# EAGLE board Analog CAN Module (EAGLE 7.7.0), part 1 of 2
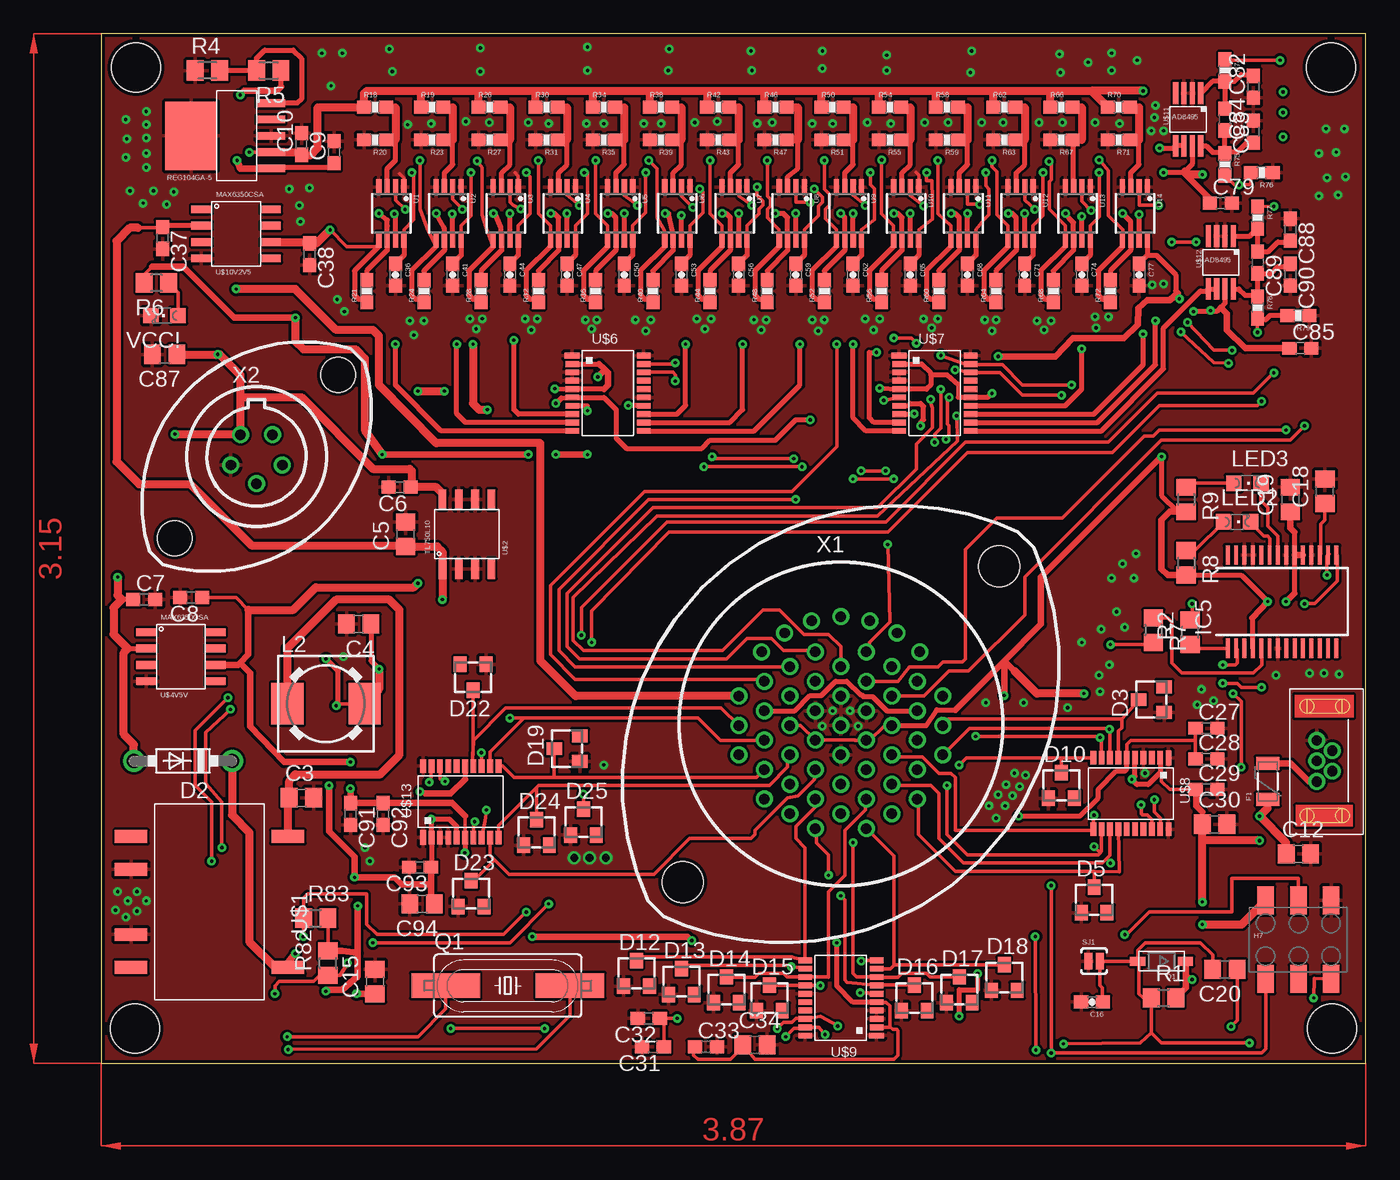
[diagram p0: board, top side]
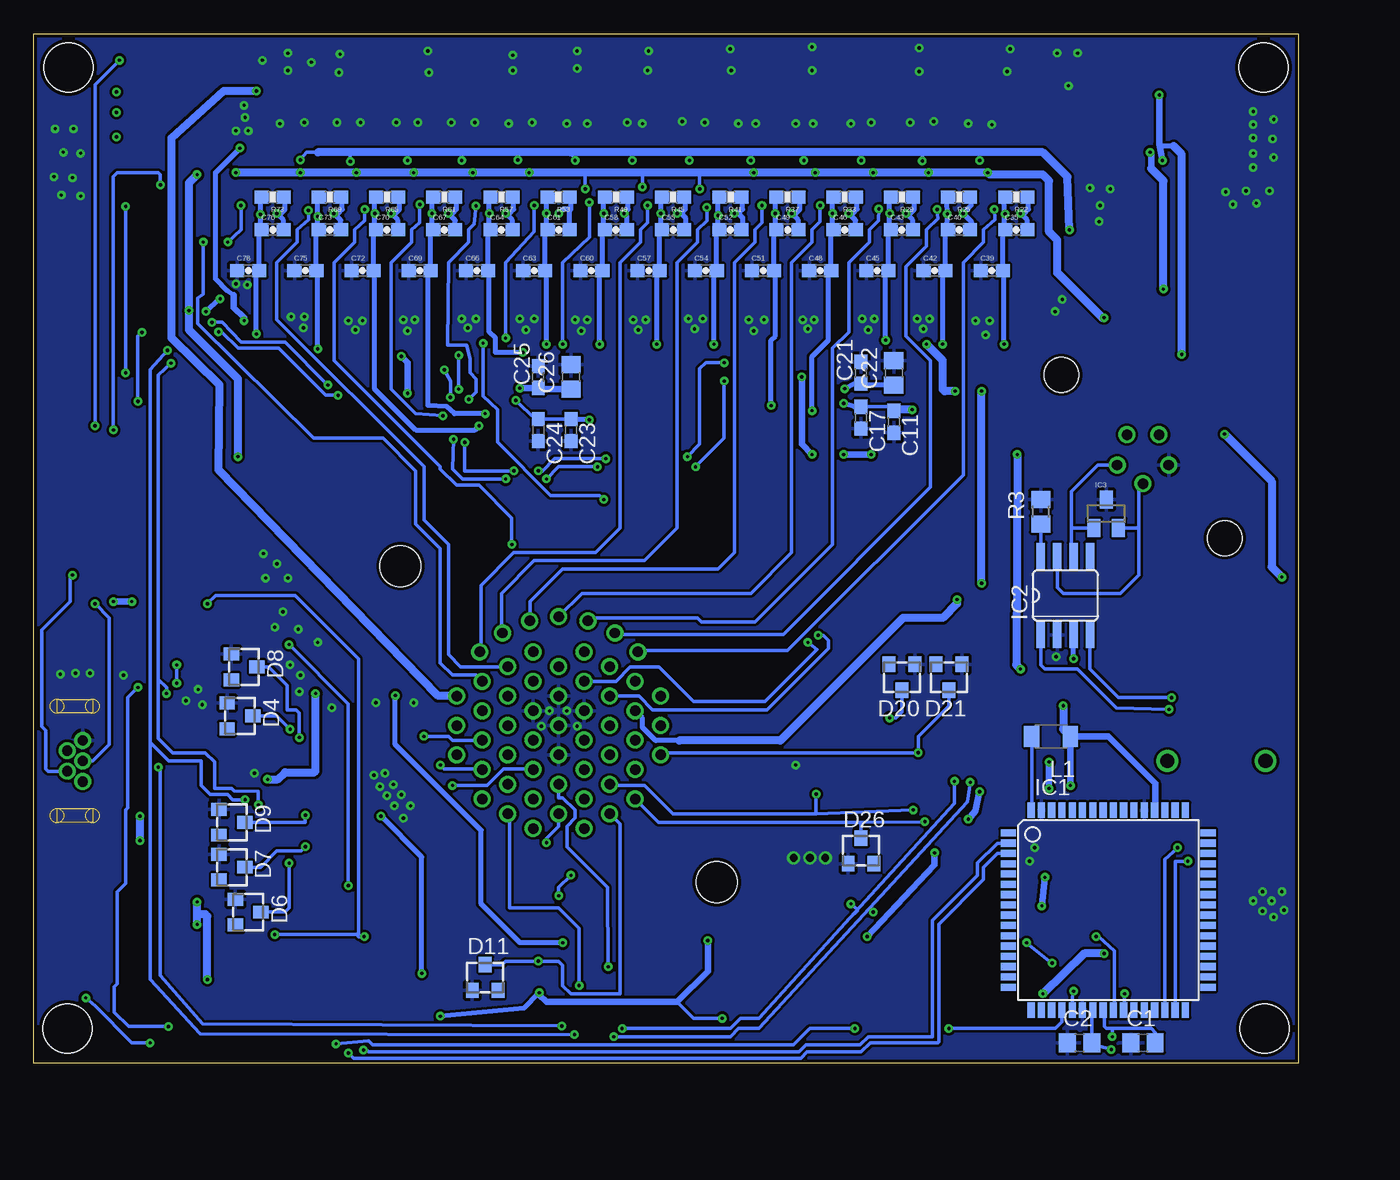
[diagram p1: board, bottom side, seen from below]

Size 98.25 x 80 mm. Coordinates in mm from the lower left corner, seen from the top.
Outline: 0,0 98.25,0 98.25,80 0,80 0,0
Copper layers (1*16): Top 0.035mm / dielectric 1.5mm / Bottom 0.035mm
Design rules "default *": minimum track width 8mil, minimum drill 10mil, track to track 8mil, track to pad 8mil, pad to pad 8mil, via to via 8mil, smd to smd 8mil, copper to edge 11mil, drill to drill 11mil, minimum pad ring 10mil, minimum via ring 8mil, stop-mask expansion 4mil, vias tented up to drill 0mil, thermal gap 10mil
Holes 3.81 mm at 95.57,77.39 2.7,77.39 2.62,2.7 95.65,2.7

## Footprints (pad centres in the part's own frame; a part is rotated, then mirrored left to right if it is on the bottom)
C0805 = smd 1.3 x 1.5: 1 -0.95,0; 2 0.95,0
C0603 = smd 1.1 x 1: 1 -0.85,0; 2 0.85,0
0603-CAP = smd 1.1 x 1: 1 -0.85,0; 2 0.85,0
SOD-123 = smd 1.2 x 0.7: A 1.85,0; C -1.85,0
DO41-7.6 = drill 1.1 pad 1.7: A 3.81,0; C -3.81,0
TO236 = smd 1 x 1.2: A -1,-1; C 0,1; NC 1,-1
PTC-1206 = smd 1 x 1.8: 1 -1.4,0; 2 1.4,0
2X3_SMD_FCI_54202-G30 = smd 1.27 x 2.18: 1 -2.54,-3.05; 2 -2.54,3.05; 3 0,-3.05; 4 0,3.05; 5 2.54,-3.05; 6 2.54,3.05
TQFP64 = smd 1.194 x 0.559: 1 -7.76,6; 2 -7.76,5.2; 3 -7.76,4.4; 4 -7.76,3.6; 5 -7.76,2.8; 6 -7.76,2; 7 -7.76,1.2; 8 -7.76,0.4; 9 -7.76,-0.4; 10 -7.76,-1.2; 11 -7.76,-2; 12 -7.76,-2.8; 13 -7.76,-3.6; 14 -7.76,-4.4; 15 -7.76,-5.2; 16 -7.76,-6; 33 7.76,-6; 34 7.76,-5.2; 35 7.76,-4.4; 36 7.76,-3.6; 37 7.76,-2.8; 38 7.76,-2; 39 7.76,-1.2; 40 7.76,-0.4; 41 7.76,0.4; 42 7.76,1.2; 43 7.76,2; 44 7.76,2.8; 45 7.76,3.6; 46 7.76,4.4; 47 7.76,5.2; 48 7.76,6 | smd 0.559 x 1.194: 17 -6,-7.76; 18 -5.2,-7.76; 19 -4.4,-7.76; 20 -3.6,-7.76; 21 -2.8,-7.76; 22 -2,-7.76; 23 -1.2,-7.76; 24 -0.4,-7.76; 25 0.4,-7.76; 26 1.2,-7.76; 27 2,-7.76; 28 2.8,-7.76; 29 3.6,-7.76; 30 4.4,-7.76; 31 5.2,-7.76; 32 6,-7.76; 49 6,7.76; 50 5.2,7.76; 51 4.4,7.76; 52 3.6,7.76; 53 2.8,7.76; 54 2,7.76; 55 1.2,7.76; 56 0.4,7.76; 57 -0.4,7.76; 58 -1.2,7.76; 59 -2,7.76; 60 -2.8,7.76; 61 -3.6,7.76; 62 -4.4,7.76; 63 -5.2,7.76; 64 -6,7.76
SO08 = smd 0.66 x 2.032: 1 -1.905,-3.073; 2 -0.635,-3.073; 3 0.635,-3.073; 4 1.905,-3.073; 5 1.905,3.073; 6 0.635,3.073; 7 -0.635,3.073; 8 -1.905,3.073
SOT-23 = smd 1 x 1.4: 1 -0.95,-1.1; 2 0.95,-1.1; 3 0,1.1
SSOP28 = smd 0.381 x 1.499: 1 -4.225,-3.625; 2 -3.575,-3.625; 3 -2.925,-3.625; 4 -2.275,-3.625; 5 -1.625,-3.625; 6 -0.975,-3.625; 7 -0.325,-3.625; 8 0.325,-3.625; 9 0.975,-3.625; 10 1.625,-3.625; 11 2.275,-3.625; 12 2.925,-3.625; 13 3.575,-3.625; 14 4.225,-3.625; 15 4.225,3.625; 16 3.575,3.625; 17 2.925,3.625; 18 2.275,3.625; 19 1.625,3.625; 20 0.975,3.625; 21 0.325,3.625; 22 -0.325,3.625; 23 -0.975,3.625; 24 -1.625,3.625; 25 -2.275,3.625; 26 -2.925,3.625; 27 -3.575,3.625; 28 -4.225,3.625
L3216C = smd 1.2 x 1.6: 1 -1.5,0; 2 1.5,0
DR73 = smd 2.5 x 3.25: 1 -3,0; 2 3,0
CHIPLED_0805 = smd 1.2 x 1.2: A 0,-1.05; C 0,1.05
HC49UP = smd 5.334 x 1.93: 1 -4.826,0; 2 4.826,0
R0805 = smd 1.3 x 1.5: 1 -0.95,0; 2 0.95,0
M0805 = smd 1.3 x 1.6: 1 -0.95,0; 2 0.95,0
0603-RES = smd 1.1 x 1: 1 -0.85,0; 2 0.85,0
SJ_2S-NO = smd 0.635 x 1.27: 1 -0.45,0; 2 0.45,0
MSOP8 = smd 0.4 x 1.2: 1 -0.975,-2.05; 2 -0.325,-2.05; 3 0.325,-2.05; 4 0.975,-2.05; 5 0.975,2.05; 6 0.325,2.05; 7 -0.325,2.05; 8 -0.975,2.05
V78XX-1000 = smd 1 x 2.54: 1 -5.08,-6.096; 5 5.08,-6.096; 6 5.08,6.096; 7 2.54,6.096; 9 -2.54,6.096; 10 -5.08,6.096
8-SOIC = smd 0.6 x 1.55: P1 -1.905,-2.7; P2 -0.635,-2.7; P3 0.635,-2.7; P4 1.905,-2.7; P5 1.905,2.7; P6 0.635,2.7; P7 -0.635,2.7; P8 -1.905,2.7
REG104GA-5 = smd 0.6 x 2.2: ENABLE 2.54,-6.2; GND 0,-6.2; NR/ADJUST 1.27,-6.2; VIN -2.54,-6.2; VOUT -1.27,-6.2 | smd 5.3 x 4: HEATGND 0,0
20TSSOP = smd 0.45 x 1.15: 1 -2.925,-2.775 | smd 0.45 x 1.05: 2 -2.275,-2.775; 3 -1.625,-2.775; 4 -0.975,-2.775; 5 -0.325,-2.775; 6 0.325,-2.775; 7 0.975,-2.775; 8 1.625,-2.775; 9 2.275,-2.775; 10 2.925,-2.775; 11 2.925,2.775; 12 2.275,2.775; 13 1.625,2.775; 14 0.975,2.775; 15 0.325,2.775; 16 -0.325,2.775; 17 -0.975,2.775; 18 -1.625,2.775; 19 -2.275,2.775; 20 -2.925,2.775
8MSOP = smd 0.4 x 1.7: P1 -0.975,-2.05; P2 -0.325,-2.05; P3 0.325,-2.05; P4 0.975,-2.05; P5 0.975,2.05; P6 0.325,2.05; P7 -0.325,2.05; P8 -0.975,2.05
MUSBB = drill 0.8: P1 -1.6,0; P2 -0.8,-1.2; P3 0,0; P4 0.8,-1.2; P5 1.6,0
AS16-35 = drill 0.813: 1 -7.925,2.184; 2 -7.925,-0.102; 3 -7.925,-2.388; 4 -6.147,5.613; 5 -5.944,3.327; 6 -5.944,1.041; 7 -5.944,-1.245; 8 -5.944,-3.531; 9 -5.944,-5.817; 10 -4.369,7.087; 11 -3.962,4.47; 12 -3.962,2.184; 13 -3.962,-0.102; 14 -3.962,-2.388; 15 -3.962,-4.674; 16 -3.962,-6.96; 17 -2.261,8.026; 18 -1.981,5.613; 19 -1.981,3.327; 20 -1.981,1.041; 21 -1.981,-1.245; 22 -1.981,-3.531; 23 -1.981,-5.817; 24 -1.981,-8.103; 25 0,8.357; 26 0,4.47; 27 0,2.184; 28 0,-0.102; 29 0,-2.388; 30 0,-4.674; 31 0,-6.96; 32 2.261,8.026; 33 1.981,5.613; 34 1.981,3.327; 35 1.981,1.041; 36 1.981,-1.245; 37 1.981,-3.531; 38 1.981,-5.817; 39 1.981,-8.103; 40 4.369,7.087; 41 3.962,4.47; 42 3.962,2.184; 43 3.962,-0.102; 44 3.962,-2.388; 45 3.962,-4.674; 46 3.962,-6.96; 47 6.147,5.613; 48 5.944,3.327; 49 5.944,1.041; 50 5.944,-1.245; 51 5.944,-3.531; 52 5.944,-5.817; 53 7.925,2.184; 54 7.925,-0.102; 55 7.925,-2.388 | hole 3.2: 12.29,12.29; -12.29,-12.29
AS06-05 = drill 0.813: 1 -1.245,1.702; 2 -2.007,-0.66; 3 0,-2.108; 4 2.007,-0.66; 5 1.245,1.702 | hole 2.7: -6.35,-6.35; 6.35,6.35

## Placement (x,y rotation side)
C1  18pF  [C0805]  12.06,1.59 0 bottom
C2  18pF  [C0805]  16.99,1.59 0 bottom
C3  22uF  [C0805]  15.56,20.64 0 top
C4  22uF  [C0805]  20,34.13 180 top
C5  10uF  [C0805]  23.65,41.12 90 top
C6  0.1uF  [C0603]  23.18,44.77 180 top
C7  2.2uF  [C0603]  3.33,36.04 0 top
C8  2.2uF  [C0603]  6.99,36.2 180 top
C9  0.1uF  [C0603]  18.1,70.8 90 top
C10  0.1uF  [C0603]  15.56,71.44 90 top
C11  1uF  [C0603]  31.43,49.85 270 bottom
C12  100n  [C0805]  93.03,16.27 0 top
C15  10uF  [C0805]  21.27,6.35 90 top
C16  4.7nF  [0603-CAP]  76.99,4.76 180 top
C17  0.1uF  [C0603]  33.97,50.16 270 bottom
C18  100n  [C0805]  95.09,44.45 90 top
C19  100n  [C0805]  92.39,43.81 90 top
C20  100n  [C0805]  87.31,7.3 180 top
C21  0.1uF  [C0603]  33.97,53.66 90 bottom
C22  10uF  [C0805]  31.43,53.66 90 bottom
C23  1uF  [C0603]  56.52,49.21 270 bottom
C24  0.1uF  [C0603]  59.05,49.21 270 bottom
C25  0.1uF  [C0603]  59.05,53.34 90 bottom
C26  10uF  [C0805]  56.52,53.34 90 bottom
C27  1uF  [C0603]  85.88,26.04 0 top
C28  0.1uF  [C0603]  85.88,23.65 0 top
C29  0.1uF  [C0603]  85.88,21.27 0 top
C30  10uF  [C0805]  86.52,18.57 0 top
C31  1uF  [C0603]  42.86,1.27 180 top
C32  0.1uF  [C0603]  42.55,3.49 180 top
C33  0.1uF  [C0603]  46.99,1.27 0 top
C34  10uF  [C0805]  50.8,1.43 0 top
C35  .1uF  [0603-CAP]  21.91,64.77 0 bottom
C36  .1uF  [0603-CAP]  22.86,61.28 270 top
C37  2.2uF  [C0603]  4.76,64.14 270 top
C38  2.2uF  [C0603]  16.19,62.87 270 top
C39  .1uF  [0603-CAP]  23.81,61.59 0 bottom
C40  .1uF  [0603-CAP]  26.35,64.77 0 bottom
C41  .1uF  [0603-CAP]  27.3,61.28 270 top
C42  .1uF  [0603-CAP]  28.26,61.59 0 bottom
C43  .1uF  [0603-CAP]  30.8,64.77 0 bottom
C44  .1uF  [0603-CAP]  31.75,61.28 270 top
C45  .1uF  [0603-CAP]  32.7,61.59 0 bottom
C46  .1uF  [0603-CAP]  35.24,64.77 0 bottom
C47  .1uF  [0603-CAP]  36.2,61.28 270 top
C48  .1uF  [0603-CAP]  37.15,61.59 0 bottom
C49  .1uF  [0603-CAP]  39.69,64.77 0 bottom
C50  .1uF  [0603-CAP]  40.64,61.28 270 top
C51  .1uF  [0603-CAP]  41.59,61.59 0 bottom
C52  .1uF  [0603-CAP]  44.13,64.77 0 bottom
C53  .1uF  [0603-CAP]  45.09,61.28 270 top
C54  .1uF  [0603-CAP]  46.04,61.59 0 bottom
C55  .1uF  [0603-CAP]  48.58,64.77 0 bottom
C56  .1uF  [0603-CAP]  49.53,61.28 270 top
C57  .1uF  [0603-CAP]  50.48,61.59 0 bottom
C58  .1uF  [0603-CAP]  53.02,64.77 0 bottom
C59  .1uF  [0603-CAP]  53.98,61.28 270 top
C60  .1uF  [0603-CAP]  54.93,61.59 0 bottom
C61  .1uF  [0603-CAP]  57.47,64.77 0 bottom
C62  .1uF  [0603-CAP]  58.42,61.28 270 top
C63  .1uF  [0603-CAP]  59.37,61.59 0 bottom
C64  .1uF  [0603-CAP]  61.91,64.77 0 bottom
C65  .1uF  [0603-CAP]  62.87,61.28 270 top
C66  .1uF  [0603-CAP]  63.82,61.59 0 bottom
C67  .1uF  [0603-CAP]  66.36,64.77 0 bottom
C68  .1uF  [0603-CAP]  67.31,61.28 270 top
C69  .1uF  [0603-CAP]  68.26,61.59 0 bottom
C70  .1uF  [0603-CAP]  70.8,64.77 0 bottom
C71  .1uF  [0603-CAP]  71.75,61.28 270 top
C72  .1uF  [0603-CAP]  72.71,61.59 0 bottom
C73  .1uF  [0603-CAP]  75.25,64.77 0 bottom
C74  .1uF  [0603-CAP]  76.2,61.28 270 top
C75  .1uF  [0603-CAP]  77.15,61.59 0 bottom
C76  .1uF  [0603-CAP]  79.69,64.77 0 bottom
C77  .1uF  [0603-CAP]  80.64,61.28 270 top
C78  .1uF  [0603-CAP]  81.6,61.59 0 bottom
C79  0.1uF  [C0603]  87,66.83 0 top
C82  1nF  [C0603]  89.53,75.88 90 top
C83  10nF  [C0603]  87.31,73.34 270 top
C84  1nF  [C0603]  89.53,72.39 90 top
C85  0.1uF  [C0603]  93.19,55.56 0 top
C87  47uF  [C0805]  4.92,55.09 180 top
C88  1nF  [C0603]  92.39,64.77 270 top
C89  10nF  [C0603]  89.85,62.23 270 top
C90  1nF  [C0603]  92.39,61.28 270 top
C91  1uF  [C0603]  19.37,19.37 270 top
C92  0.1uF  [C0603]  21.91,19.37 270 top
C93  0.1uF  [C0603]  24.77,15.24 180 top
C94  10uF  [C0805]  24.92,12.38 180 top
D1  1N4148  [SOD-123]  82.39,7.94 180 top
D2  1N5819  [DO41-7.6]  6.35,23.5 180 top
D3  BZX84CSMD  [TO236]  81.6,28.26 90 top
D4  BZX84CSMD  [TO236]  82.23,26.99 270 bottom
D5  BZX84CSMD  [TO236]  77.15,12.7 0 top
D6  BZX84CSMD  [TO236]  81.6,11.75 270 bottom
D7  BZX84CSMD  [TO236]  82.87,15.24 270 bottom
D8  BZX84CSMD  [TO236]  81.92,30.8 270 bottom
D9  BZX84CSMD  [TO236]  82.87,18.73 270 bottom
D10  BZX84CSMD  [TO236]  74.61,21.59 0 top
D11  BZX84CSMD  [TO236]  63.18,6.67 0 bottom
D12  BZX84CSMD  [TO236]  41.59,6.99 0 top
D13  BZX84CSMD  [TO236]  45.09,6.35 0 top
D14  BZX84CSMD  [TO236]  48.58,5.71 0 top
D15  BZX84CSMD  [TO236]  51.91,5.08 0 top
D16  BZX84CSMD  [TO236]  63.18,5.08 0 top
D17  BZX84CSMD  [TO236]  66.67,5.71 0 top
D18  BZX84CSMD  [TO236]  70.17,6.67 0 top
D19  BZX84CSMD  [TO236]  36.2,24.45 90 top
D20  BZX84CSMD  [TO236]  30.8,30 180 bottom
D21  BZX84CSMD  [TO236]  27.15,30 180 bottom
D22  BZX84CSMD  [TO236]  28.89,30 180 top
D23  BZX84CSMD  [TO236]  28.73,13.18 0 top
D24  BZX84CSMD  [TO236]  33.81,17.94 0 top
D25  BZX84CSMD  [TO236]  37.47,18.73 0 top
D26  BZX84CSMD  [TO236]  33.97,16.51 0 bottom
F1  16V,0.25A  [PTC-1206]  90.65,21.91 90 top
H7  ICSP  [2X3_SMD_FCI_54202-G30]  93.03,9.6 0 top
IC1  AT90CAN128  [TQFP64]  14.76,11.91 0 bottom
IC2  MCP2551SO8  [SO08]  18.1,36.35 0 bottom
IC3  NUP2105L  [SOT-23]  14.92,42.7 0 bottom
IC5  FT232RL  [SSOP28]  91.76,35.88 0 top
L1  CS321613-100K  [L3216C]  19.21,25.4 180 bottom
L2  22uH  [DR73]  17.46,27.94 0 top
LED2  RX  [CHIPLED_0805]  88.27,42.07 270 top
LED3  TX  [CHIPLED_0805]  89.06,45.09 270 top
Q1  56P2859  [HC49UP]  31.59,6.03 0 top
R1  100K  [R0805]  82.55,5.08 0 top
R2  1k  [R0805]  84.61,33.5 90 top
R3  100K  [R0805]  20,42.86 90 bottom
R4  100K  [M0805]  8.26,77.15 0 top
R5  100K  [M0805]  13.02,77.15 180 top
R6  1K  [R0805]  4.29,60.64 180 top
R7  1k  [R0805]  81.76,33.66 270 top
R8  1k  [R0805]  84.3,38.89 270 top
R9  1k  [R0805]  84.3,43.81 270 top
R18  1k  [0603-RES]  21.27,74.3 0 top
R19  1k  [0603-RES]  25.72,74.3 0 top
R20  1k  [0603-RES]  21.27,71.75 180 top
R21  10  [0603-RES]  20.64,60.01 90 top
R22  100R680R3k3  [0603-RES]  21.91,67.31 180 bottom
R23  1k  [0603-RES]  25.72,71.75 180 top
R24  10  [0603-RES]  25.08,60.01 90 top
R25  100R680R3k3  [0603-RES]  26.35,67.31 180 bottom
R26  1k  [0603-RES]  30.16,74.3 0 top
R27  1k  [0603-RES]  30.16,71.75 180 top
R28  10  [0603-RES]  29.53,60.01 90 top
R29  100R680R3k3  [0603-RES]  30.8,67.31 180 bottom
R30  1k  [0603-RES]  34.61,74.3 0 top
R31  1k  [0603-RES]  34.61,71.75 180 top
R32  10  [0603-RES]  33.97,60.01 90 top
R33  100R680R3k3  [0603-RES]  35.24,67.31 180 bottom
R34  1k  [0603-RES]  39.05,74.3 0 top
R35  1k  [0603-RES]  39.05,71.75 180 top
R36  10  [0603-RES]  38.42,60.01 90 top
R37  100R680R3k3  [0603-RES]  39.69,67.31 180 bottom
R38  1k  [0603-RES]  43.5,74.3 0 top
R39  1k  [0603-RES]  43.5,71.75 180 top
R40  10  [0603-RES]  42.86,60.01 90 top
R41  100R680R3k3  [0603-RES]  44.13,67.31 180 bottom
R42  1k  [0603-RES]  47.94,74.3 0 top
R43  1k  [0603-RES]  47.94,71.75 180 top
R44  10  [0603-RES]  47.31,60.01 90 top
R45  100R680R3k3  [0603-RES]  48.58,67.31 180 bottom
R46  1k  [0603-RES]  52.39,74.3 0 top
R47  1k  [0603-RES]  52.39,71.75 180 top
R48  10  [0603-RES]  51.75,60.01 90 top
R49  100R680R3k3  [0603-RES]  53.02,67.31 180 bottom
R50  1k  [0603-RES]  56.83,74.3 0 top
R51  1k  [0603-RES]  56.83,71.75 180 top
R52  10  [0603-RES]  56.2,60.01 90 top
R53  100R680R3k3  [0603-RES]  57.47,67.31 180 bottom
R54  1k  [0603-RES]  61.28,74.3 0 top
R55  1k  [0603-RES]  61.28,71.75 180 top
R56  10  [0603-RES]  60.64,60.01 90 top
R57  100R680R3k3  [0603-RES]  61.91,67.31 180 bottom
R58  1k  [0603-RES]  65.72,74.3 0 top
R59  1k  [0603-RES]  65.72,71.75 180 top
R60  10  [0603-RES]  65.09,60.01 90 top
R61  100R680R3k3  [0603-RES]  66.36,67.31 180 bottom
R62  1k  [0603-RES]  70.17,74.3 0 top
R63  1k  [0603-RES]  70.17,71.75 180 top
R64  10  [0603-RES]  69.53,60.01 90 top
R65  100R680R3k3  [0603-RES]  70.8,67.31 180 bottom
R66  1k  [0603-RES]  74.61,74.3 0 top
R67  1k  [0603-RES]  74.61,71.75 180 top
R68  10  [0603-RES]  73.98,60.01 90 top
R69  100R680R3k3  [0603-RES]  75.25,67.31 180 bottom
R70  1k  [0603-RES]  79.06,74.3 0 top
R71  1k  [0603-RES]  79.06,71.75 180 top
R72  10  [0603-RES]  78.42,60.01 90 top
R73  100R680R3k3  [0603-RES]  79.69,67.31 180 bottom
R74  10K  [0603-RES]  87.31,77.15 270 top
R75  10K  [0603-RES]  87.31,69.85 270 top
R76  1M  [0603-RES]  90.17,69.22 180 top
R77  10K  [0603-RES]  89.85,65.72 270 top
R78  10K  [0603-RES]  89.85,58.74 270 top
R79  1M  [0603-RES]  93.03,58.1 180 top
R82  4.7k  [R0805]  17.62,7.78 90 top
R83  4.7k  [R0805]  16.67,11.27 0 top
SJ1  SOLDERJUMPERNO  [SJ_2S-NO]  77.15,7.94 0 top
U1  LTC2053  [MSOP8]  22.54,66.04 180 top
U2  LTC2053  [MSOP8]  26.99,66.04 180 top
U3  LTC2053  [MSOP8]  31.43,66.04 180 top
U4  LTC2053  [MSOP8]  35.88,66.04 180 top
U5  LTC2053  [MSOP8]  40.32,66.04 180 top
U6  LTC2053  [MSOP8]  44.77,66.04 180 top
U7  LTC2053  [MSOP8]  49.21,66.04 180 top
U8  LTC2053  [MSOP8]  53.66,66.04 180 top
U9  LTC2053  [MSOP8]  58.1,66.04 180 top
U10  LTC2053  [MSOP8]  62.55,66.04 180 top
U11  LTC2053  [MSOP8]  66.99,66.04 180 top
U12  LTC2053  [MSOP8]  71.44,66.04 180 top
U13  LTC2053  [MSOP8]  75.88,66.04 180 top
U14  LTC2053  [MSOP8]  80.33,66.04 180 top
U$1  V7805-1000  [V78XX-1000]  8.41,12.54 90 top
U$2  TL750L10  [8-SOIC]  28.42,41.12 0 top
U$4V5V  MAX6350CSA  [8-SOIC]  6.19,31.59 270 top
U$5  REG-104GA-5  [REG104GA-5]  6.99,72.07 90 top
U$6  AD7998  [20TSSOP]  39.37,52.07 270 top
U$7  AD7998  [20TSSOP]  64.77,52.07 270 top
U$8  AD7998  [20TSSOP]  80.01,20.95 180 top
U$9  AD7998  [20TSSOP]  57.47,5.08 90 top
U$10V2V5  MAX6350CSA  [8-SOIC]  10.48,64.45 270 top
U$11  AD8495  [8MSOP]  84.45,73.34 180 top
U$12  AD8495  [8MSOP]  87,62.23 180 top
U$13  AD7998  [20TSSOP]  27.94,20.32 0 top
U$14  MUSBB  [MUSBB]  94.46,23.5 90 top
VCC!  PWR  [CHIPLED_0805]  4.92,58.1 90 top
X1  AS16-35  [AS16-35]  57.47,26.35 0 top
X2  AS06-05  [AS06-05]  12.06,47.15 0 top

## Library data of the parts
C1 C2 C5-C12 C17-C34 C37 C38 C79 C82-C85 C87-C94 L1 R1-R9 R82 R83 = rcl
C3 C4 C15 = resistor
C16 = SparkFun-Capacitors
C35 C36 C39-C78 SJ1 = SparkFun-Passives
D1 = adafruit
D2-D26 = diode
F1 = SparkFun
H7 = SparkFun-Connectors
IC1 = at90can128
IC2 = can
IC3 = Artificial Science
IC5 = SmartPrj
L2 = inductors
LED2 LED3 VCC! = led
Q1 = SparkFun-FreqCtrl
R18-R79 = SparkFun-Resistors
U1-U14 = linear-technology
U$1 = formula electric
U$2 U$4V5V U$5-U$9 U$10V2V5 U$11-U$14 = DashAndCAN library
X1 X2 = con-deutsch; OC_FARNELL: unknown; OC_NEWARK: unknown

## Nets
2V5REF: C38.1 R21.1 R24.1 R28.1 R32.1 R36.1 R40.1 R44.1 R48.1 R52.1 R56.1 R60.1 R64.1 R68.1 R72.1 U1.5 U2.5 U3.5 U4.5 U5.5 U6.5 U7.5 U8.5 U9.5 U10.5 U11.5 U12.5 U13.5 U14.5 U$10V2V5.P6
5VREF: C8.1 C11.1 C17.1 C23.1 C24.1 C27.1 C28.1 C31.1 C32.1 C91.1 C92.1 U$4V5V.P6 U$6.6 U$7.6 U$8.6 U$9.6 U$13.6
10V: C5.1 C37.1 U$2.P1 U$10V2V5.P2 X1.6 X1.49
12V: C6.1 C7.1 C9.1 C87.1 D2.A R5.1 U$2.P8 U$4V5V.P2 U$5.VIN X2.1
12V_PROTECTED: C15.1 D2.C U$1.1
A1: D3.C U$8.7 X1.54
A2: D4.C U$8.8 X1.55
A3: D8.C U$8.9 X1.50
A4: D10.C U$8.10 X1.51
A5: D9.C U$8.11 X1.44
A6: D7.C U$8.12 X1.37
A7: D6.C U$8.13 X1.45
A8: D5.C U$8.14 X1.52
A9: D16.C U$9.7 X1.24
A10: D17.C U$9.8 X1.31
A11: D18.C U$9.9 X1.39
A12: D11.C U$9.10 X1.16
A13: D12.C U$9.11 X1.23
A14: D13.C U$9.12 X1.30
A15: D14.C U$9.13 X1.38
A16: D15.C U$9.14 X1.46
A17: D26.C U$13.7 X1.9
A18: D25.C U$13.8 X1.15
A19: D23.C U$13.9 X1.22
A20: D24.C U$13.10 X1.14
A21: D19.C U$13.11 X1.8
A22: D20.C U$13.12 X1.7
A23: D21.C U$13.13 X1.3
A24: D22.C U$13.14 X1.2
AREF: IC1.62
AVR_CS: IC1.10
AVR_MISO: IC1.13
AVR_MOSI: IC1.12
AVR_SCK: IC1.11
CAN_H: IC2.7 IC3.2 X2.3
CAN_L: IC2.6 IC3.1 X2.4
D+: IC5.15 U$14.P3
D-: IC5.16 U$14.P2
DTR: C20.1 IC5.2
GND: C1.1 C2.1 C3.2 C4.2 C5.2 C6.2 C7.2 C8.2 C9.2 C10.2 C11.2 C12.2 C15.2 C16.2 C17.2 C18.2 C19.2 C21.2 C22.2 C23.2 C24.2 C25.2 C26.2 C27.2 C28.2 C29.2 C30.2 C31.2 C32.2 C33.2 C34.2 C36.2 C37.2 C38.2 C39.1 C41.2 C42.1 C44.2 C45.1 C47.2 C48.1 C50.2 C51.1 C53.2 C54.1 C56.2 C57.1 C59.2 C60.1 C62.2 C63.1 C65.2 C66.1 C68.2 C69.1 C71.2 C72.1 C74.2 C75.1 C77.2 C78.1 C79.2 C82.1 C84.2 C85.2 C87.2 C88.1 C90.2 C91.2 C92.2 C93.2 C94.2 D3.A D4.A D5.A D6.A D7.A D8.A D9.A D10.A D11.A D12.A D13.A D14.A D15.A D16.A D17.A D18.A D19.A D20.A D21.A D22.A D23.A D24.A D25.A D26.A H7.6 IC1.22 IC1.53 IC1.63 IC2.2 IC3.3 IC5.7 IC5.18 IC5.21 IC5.25 IC5.26 R3.2 R4.1 R20.2 R23.2 R27.2 R31.2 R35.2 R39.2 R43.2 R47.2 R51.2 R55.2 R59.2 R63.2 R67.2 R71.2 R76.1 R79.1 SJ1.1 U1.1 U1.4 U2.1 U2.4 U3.1 U3.4 U4.1 U4.4 U5.1 U5.4 U6.1 U6.4 U7.1 U7.4 U8.1 U8.4 U9.1 U9.4 U10.1 U10.4 U11.1 U11.4 U12.1 U12.4 U13.1 U13.4 U14.1 U14.4 U$1.7 U$1.9 U$2.P2 U$2.P3 U$2.P6 U$2.P7 U$4V5V.P4 U$5.GND U$5.HEATGND U$6.1 U$6.3 U$6.4 U$6.15 U$6.20 U$7.1 U$7.3 U$7.4 U$7.20 U$8.1 U$8.4 U$8.20 U$9.1 U$9.3 U$9.4 U$9.15 U$9.20 U$10V2V5.P4 U$11.P2 U$11.P3 U$12.P2 U$12.P3 U$13.1 U$13.3 U$13.4 U$13.20 U$14.P5 VCC!.C X1.20 X1.27 X1.28 X1.29 X1.35 X2.2
INT_N: IC1.9
M8RXD: IC5.1 R2.1
M8TXD: IC5.5 R7.1
N$1: C35.2 R21.2 R22.1 U1.6
N$2: R4.2 R5.2 U$5.ENABLE
N$3: R66.2 R67.1 U13.3
N$4: R18.2 R20.1 U1.3
N$5: R19.2 R23.1 U2.3
N$6: IC2.8 R3.1
N$7: C40.2 R24.2 R25.1 U2.6
N$8: R26.2 R27.1 U3.3
N$9: R6.1 VCC!.A
N$10: C43.2 R28.2 R29.1 U3.6
N$11: C1.2 IC1.24 Q1.1
N$12: R30.2 R31.1 U4.3
N$13: C3.1 L2.1 U$1.5
N$14: C46.2 R32.2 R33.1 U4.6
N$15: R34.2 R35.1 U5.3
N$16: C49.2 R36.2 R37.1 U5.6
N$17: R38.2 R39.1 U6.3
N$18: C52.2 R40.2 R41.1 U6.6
N$19: R42.2 R43.1 U7.3
N$20: C55.2 R44.2 R45.1 U7.6
N$21: R46.2 R47.1 U8.3
N$22: IC1.64 L1.2
N$23: C58.2 R48.2 R49.1 U8.6
N$24: R50.2 R51.1 U9.3
N$25: C61.2 R52.2 R53.1 U9.6
N$26: R54.2 R55.1 U10.3
N$27: C64.2 R56.2 R57.1 U10.6
N$28: R58.2 R59.1 U11.3
N$29: C67.2 R60.2 R61.1 U11.6
N$30: R62.2 R63.1 U12.3
N$31: C70.2 R64.2 R65.1 U12.6
N$32: IC5.23 LED2.C
N$33: C73.2 R68.2 R69.1 U13.6
N$34: IC5.22 LED3.C
N$35: LED2.A R8.1
N$36: LED3.A R9.1
N$37: R70.2 R71.1 U14.3
N$38: C76.2 R72.2 R73.1 U14.6
N$40: C88.2 C89.1 R77.2 U$12.P1
N$41: C83.2 C84.1 R75.1 U$11.P8
N$42: C89.2 C90.1 R78.1 U$12.P8
N$43: C82.2 C83.1 R74.2 U$11.P1
PA0: IC1.51
PA1: IC1.50
PA2: IC1.49
PA3: IC1.48
PA4: IC1.47
PA5: IC1.46
PA6: IC1.45
PA7: IC1.44
PB4(PWM): IC1.14
PB5(PWM): IC1.15
PB6(PWM): IC1.16
PB7(PWM): IC1.17
PC0: IC1.35
PC1: IC1.36
PC2: IC1.37
PC3: IC1.38
PC4: IC1.39
PC5: IC1.40
PC6: IC1.41
PC7: IC1.42
PD4: IC1.29
PD7: IC1.32
PE2: IC1.4
PE3(PWM): IC1.5
PE4(PWM): IC1.6
PE5(PWM): IC1.7
PE6: IC1.8
PF0: IC1.61
PF1: IC1.60
PF2: IC1.59
PF3: IC1.58
PG0: IC1.33
PG1: IC1.34
PG2: IC1.43
RESET: C16.1 C20.2 D1.A H7.5 IC1.20 R1.1 SJ1.2
RX: H7.4 IC1.2 R2.2
RX1: IC1.27
RXCAN: IC1.31 IC2.4
SCK: H7.3
SCL: IC1.25 R83.1 U$6.19 U$7.19 U$8.19 U$9.19 U$13.19
SDA: IC1.26 R82.1 U$6.18 U$7.18 U$8.18 U$9.18 U$13.18
SG5V: C10.1 R18.1 R19.1 R26.1 R30.1 R34.1 R38.1 R42.1 R46.1 R50.1 R54.1 R58.1 R62.1 R66.1 R70.1 U$5.VOUT X1.1 X1.53
SG_1: U1.2 X1.4
SG_2: U2.2 X1.10
SG_3: U3.2 X1.17
SG_4: U4.2 X1.25
SG_5: U5.2 X1.32
SG_6: U6.2 X1.40
SG_7: U7.2 X1.47
SG_8: U8.2 X1.5
SG_9: U9.2 X1.11
SG_10: U10.2 X1.18
SG_11: U11.2 X1.26
SG_12: U12.2 X1.33
SG_13: U13.2 X1.41
SG_14: U14.2 X1.48
SGO1: C35.1 C39.2 R22.2 U1.7 U$6.10
SGO2: C40.1 C42.2 R25.2 U2.7 U$6.9
SGO3: C43.1 C45.2 R29.2 U3.7 U$6.8
SGO4: C46.1 C48.2 R33.2 U4.7 U$6.7
SGO5: C49.1 C51.2 R37.2 U5.7 U$6.14
SGO6: C52.1 C54.2 R41.2 U6.7 U$6.13
SGO7: C55.1 C57.2 R45.2 U7.7 U$6.12
SGO8: C58.1 C60.2 R49.2 U8.7 U$6.11
SGO9: C61.1 C63.2 R53.2 U9.7 U$7.10
SGO10: C64.1 C66.2 R57.2 U10.7 U$7.9
SGO11: C67.1 C69.2 R61.2 U11.7 U$7.8
SGO12: C70.1 C72.2 R65.2 U12.7 U$7.7
SGO13: C73.1 C75.2 R69.2 U13.7 U$7.14
SGO14: C76.1 C78.2 R73.2 U14.7 U$7.13
TCI1+: R74.1 X1.42
TCI1-: R75.2 R76.2 X1.34
TCI2+: R77.1 X1.12
TCI2-: R78.2 R79.2 X1.19
TCK: IC1.57
TCO1: U$7.12 U$11.P5 U$11.P6
TCO2: U$7.11 U$12.P5 U$12.P6
TDI: IC1.54
TDO: IC1.55
TMS: IC1.56
TX: H7.1 IC1.3 R7.2
TX1: IC1.28
TXCAN: IC1.30 IC2.1
USB_V_IN [usbvcc]: F1.2 U$14.P1
VCC: C4.1 C12.1 C19.1 C21.1 C22.1 C25.1 C26.1 C29.1 C30.1 C33.1 C34.1 C36.1 C41.1 C44.1 C47.1 C50.1 C53.1 C56.1 C59.1 C62.1 C65.1 C68.1 C71.1 C74.1 C77.1 C79.1 C85.1 C93.1 C94.1 D1.C F1.1 H7.2 IC1.21 IC1.52 IC2.3 IC5.4 IC5.19 IC5.20 L1.1 L2.2 R1.2 R6.2 R8.2 R9.2 R82.2 R83.2 U1.8 U2.8 U3.8 U4.8 U5.8 U6.8 U7.8 U8.8 U9.8 U10.8 U11.8 U12.8 U13.8 U14.8 U$6.2 U$6.5 U$7.2 U$7.5 U$7.15 U$8.2 U$8.5 U$9.2 U$9.5 U$11.P7 U$12.P7 U$13.2 U$13.5 U$13.15 X1.13 X1.21 X1.36 X1.43
VCC3O: C18.1 IC5.17
XTAL1: C2.2 IC1.23 Q1.2